# Altium PCB MAGIsDebugger-STLink.PcbDoc
Units mil, origin at the board's own origin, x right, y up, seen from the top; angles counter-clockwise.
Board outline 6000 x 4000 mil, 2 copper layers (Top Layer, Bottom Layer); 31 components, 25 nets, 167 pads, 21 vias.
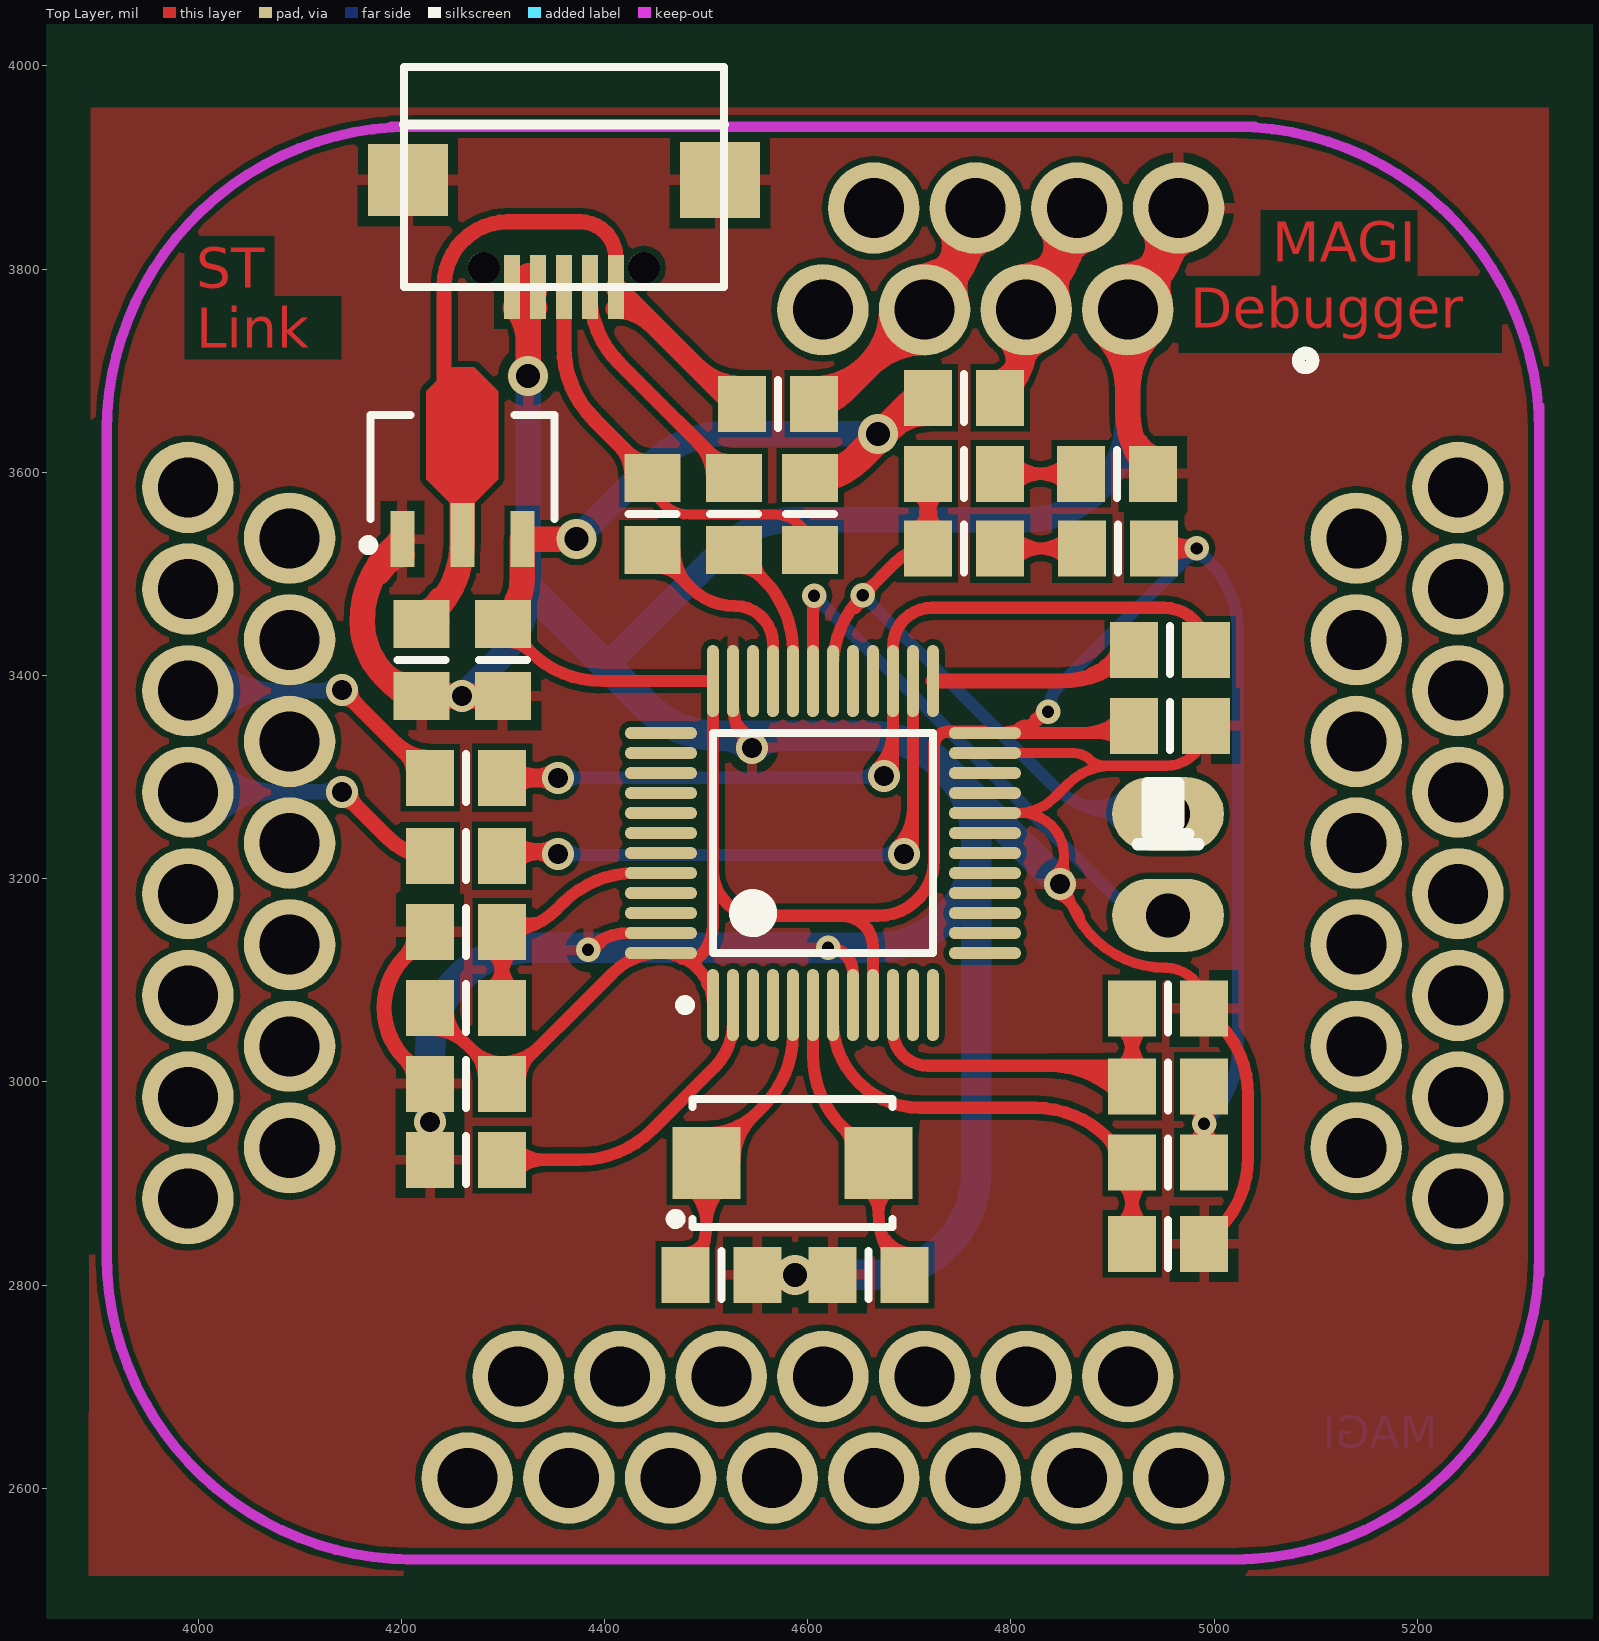
[diagram p0: Top Layer view]
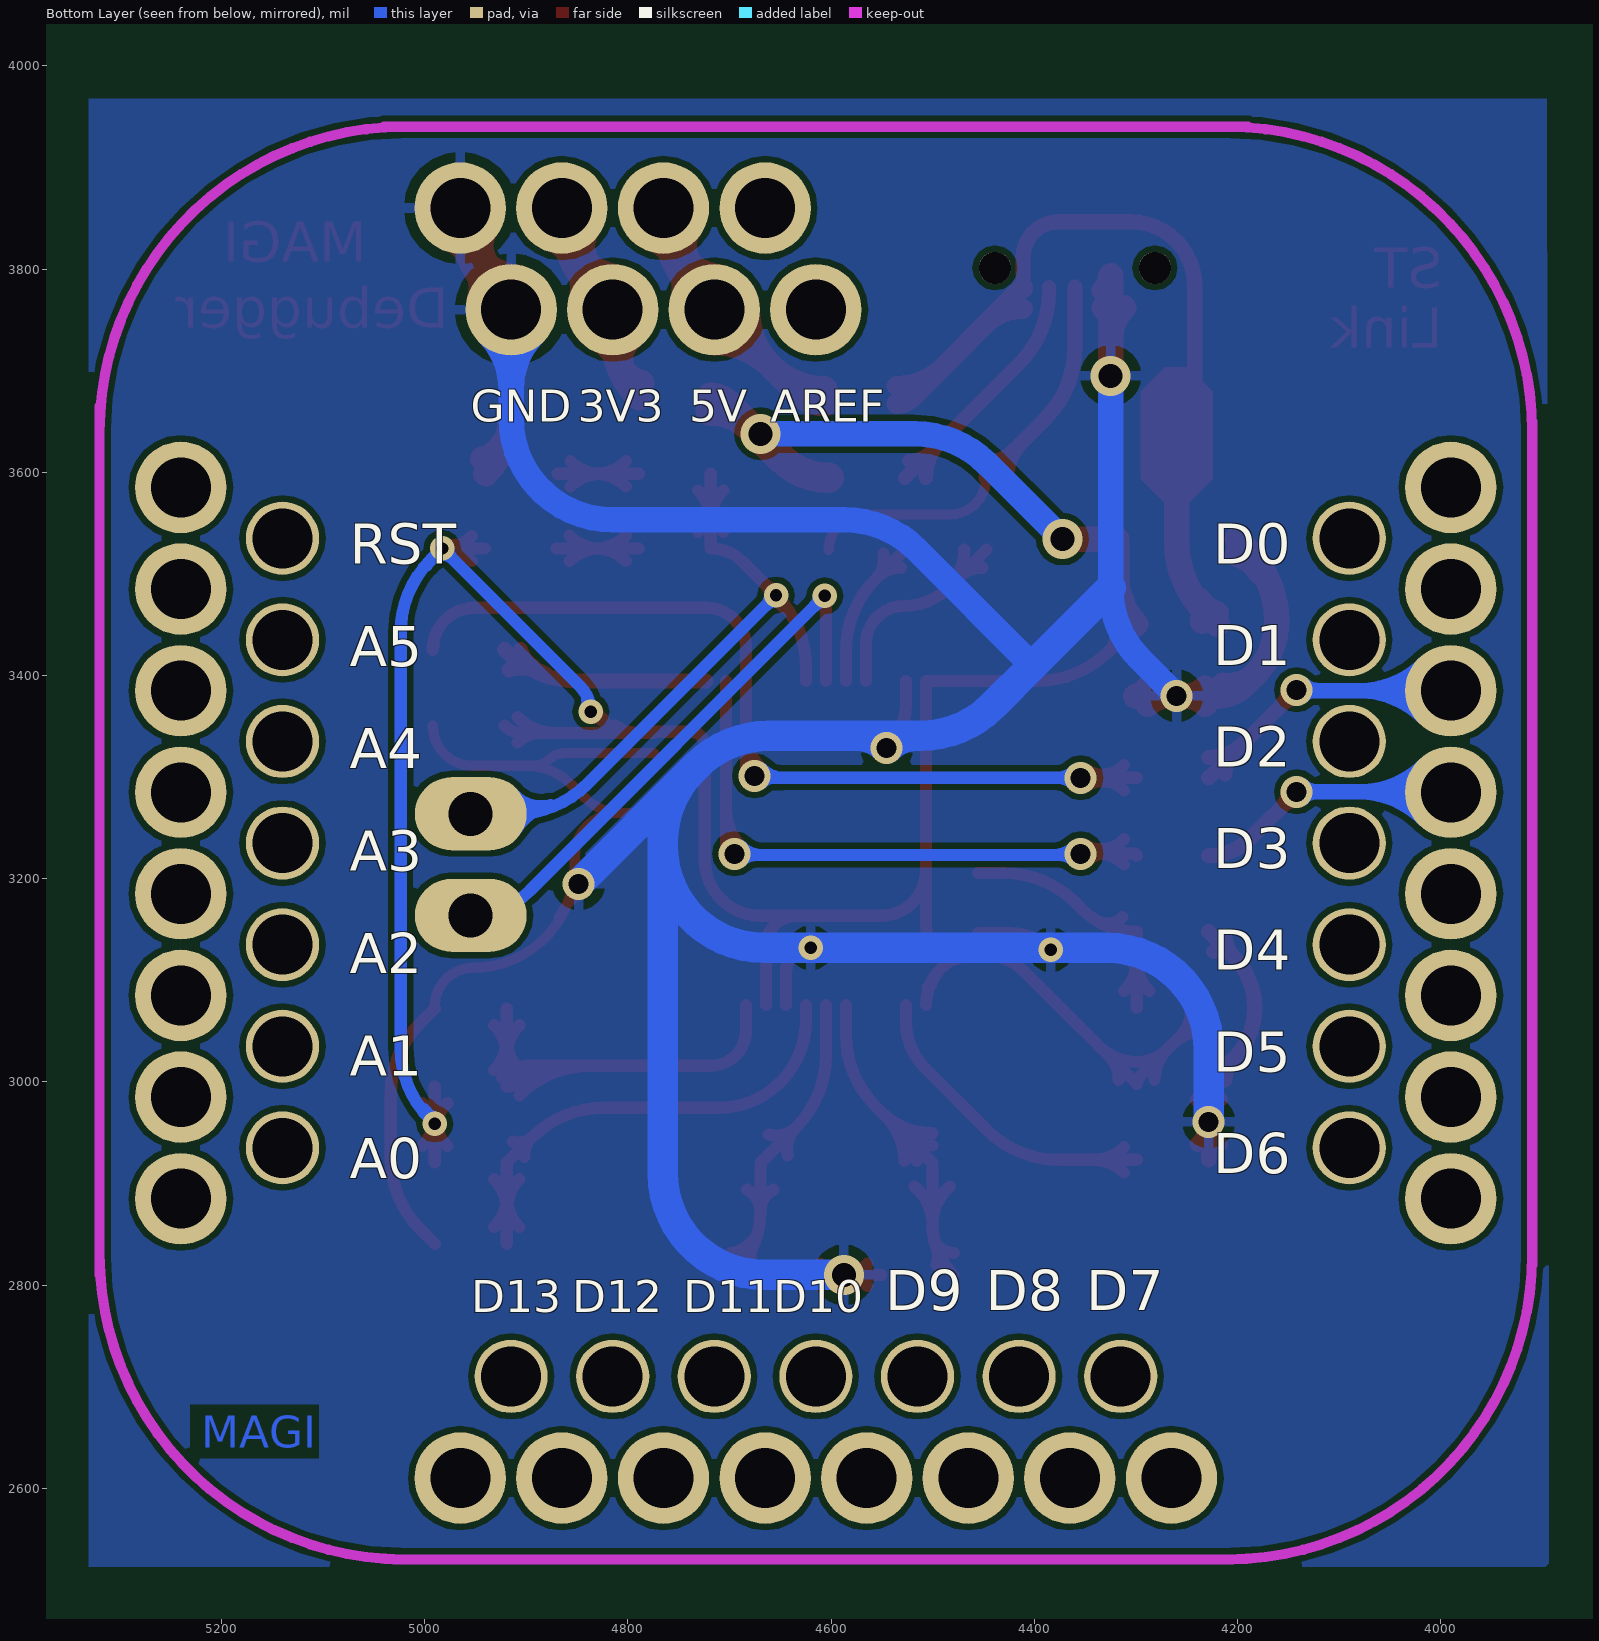
[diagram p1: Bottom Layer view, seen from below]

## Layer stack, top to bottom
Top Solder: solder mask 0.4, Solder Resist, Dk 3.5
Top Layer: signal copper 1.4
Dielectric 1: dielectric 12.6, FR-4, Dk 4.8
Bottom Layer: signal copper 1.4
Bottom Solder: solder mask 0.4, Solder Resist, Dk 3.5

## Board outline
1000,1000 7000,1000 7000,5000 1000,5000

## Design rules (kind name [scope] priority, off if disabled: settings)
Clearance [All] p1: gap=6
PolygonConnect [All] p1: connectstyle=Relief reliefconductorwidth=10 reliefentries=4 polygonreliefangle="90 Angle" airgapwidth=10
RoutingVias [All] p1: holewidth=28 width=50 viastyle="Through Hole" minholewidth=12 minwidth=24 maxholewidth=280 maxwidth=500
SolderMaskExpansion [All] p1: expansion=4
Width [All] p1: maxlimit=100 minlimit=6 preferedwidth=10
29 further rules are at their usual default settings.

## Components (designator, comment, footprint, x,y, rotation, side; value= is the part's Value field where it differs from the comment)
C1 "10uf" 6-0805_n 4220,3415 r270 top
C2 "10uf" 6-0805_n 4300,3415 r270 top
C3 "10uf" 6-0805_n 4263.78,2998.03 r180 top
C4 "10uf" 6-0805_N 4956.69,3350.39 r0 top
C5 "15PF" 6-0805_n 4515,2810 r180 top
C6 "15PF" 6-0805_n 4660,2810 r0 top
C7 "104" 6-0805_n 4954.72,2840.55 r180 top
J1 "MAGIsBoard-2x" MAGIsBoard-2x 4615,3235 r0 top
J2 "CON2" SIP2 4954.72,3263.78 r270 top
LED1 "LED_3" 6-0805_n 4905.51,3525 r180 top
LED2 "LED_3" 6-0805_n 4904.57,3598.42 r0 top
R1 "10K" 6-0805_n 4602.36,3559.06 r270 top
R2 "10K" 6-0805_n 4527.36,3559.06 r270 top
R3 "10K" 6-0805_n 4954.72,2995.35 r0 top
R4 "10K" 6-0805_n 4447.36,3559.06 r270 top
R5 "100" 6-0805_n 4956.69,3425.2 r180 top
R6 "10K" 6-0805_n 4954.72,3072.13 r180 top
R7 "10K" 6-0805_n 4263.78,2923.23 r0 top
R8 "0" 6-0805_n 4570.87,3667.32 r0 top
R9 "0" 6-0805_n 4753.94,3673.23 r0 top
R10 "10K" 6-0805_n 4954.72,2920.55 r0 top
R11 "10K" 6-0805_n 4263.78,3072.83 r180 top
R12 "0" 6-0805_n 4263.78,3299.21 r180 top
R13 "10K" 6-0805_n 4263.78,3147.64 r0 top
R15 "0" 6-0805_n 4263.78,3222.44 r180 top
R16 "RES1_1" 6-0805_n 4753.94,3525 r180 top
R17 "RES1_1" 6-0805_n 4753.94,3598.43 r180 top
U1 "USB" microUSB 4360,3805 r0 top
U2 "STM32F103CBT6" LQFP48_N 4615,3235 r90 top
U3 "HS7333" HS7333 4260,3605 r90 top
X1 "8M" 5032 4595,2920 r270 top

## Footprints (in the part's own frame and the unit in brackets; to place one, negate y for a bottom-side part, rotate by r counter-clockwise, add the part's x,y. Pads: shape width x height; smd on the part's side, far side on the other; paste and mask are expansions set on the pad)
6-0805_n [mm] "Chip Resistor, Body 2.0x1.2mm, IPC Medium Density"
  rect 1.2x1.4 smd: 1(-0.9,0) 2(0.9,0)
  silkscreen extent 0,-0.6 0,0.6, body extent -1.07,-0.7 1.07,0.7, height 0.7
6-0805_N [mm] "Chip Resistor, Body 2.0x1.2mm, IPC Medium Density"
  rect 1.2x1.4 smd: 1(-0.9,0) 2(0.9,0)
  silkscreen extent 0,-0.6 0,0.6, body extent -1.07,-0.7 1.07,0.7, height 0.7
5032 [mm]
  rect 1.8x1.7 smd: 1(0,-2.404) 2(0,1.896)
  silkscreen extent -1.6,-3.3 1.6,2.25
HS7333 [mm] "SOT89, 3-Leads, Body 4.50x2.50mm, Pitch 1.50mm, Lead Span 4.1mm, IPC Medium Density"
  rect 1.4x0.6 smd: 1(-1.8,1.5) 3(-1.8,-1.5)
  rect 1.6x0.6 smd: 2(-1.7,0)
  Top Layer region: -0.9,0.3 -0.3,0.9 1.9,0.9 2.5,0.3 2.5,-0.3 1.9,-0.9 -0.3,-0.9 -0.9,-0.3
  silkscreen extent -2.07,-2.3 1.3,2.47, body extent -1.3,-2.3 1.3,2.3, height 1.6
LQFP48_N [mm] "Thin QFP, 48-Leads, Body 7x7mm, Pitch 0.5mm, IPC Medium Density"
  oval 1.8x0.3 smd: 1(-4.05,2.75) 2(-4.05,2.25) 3(-4.05,1.75) 4(-4.05,1.25) 5(-4.05,0.75) 6(-4.05,0.25) 7(-4.05,-0.25) 8(-4.05,-0.75) 9(-4.05,-1.25) 10(-4.05,-1.75) 11(-4.05,-2.25) 12(-4.05,-2.75) 25(4.05,-2.75) 26(4.05,-2.25) 27(4.05,-1.75) 28(4.05,-1.25) 29(4.05,-0.75) 30(4.05,-0.25) 31(4.05,0.25) 32(4.05,0.75) 33(4.05,1.25) 34(4.05,1.75) 35(4.05,2.25) 36(4.05,2.75)
  oval 0.3x1.8 smd: 13(-2.75,-4.05) 14(-2.25,-4.05) 15(-1.75,-4.05) 16(-1.25,-4.05) 17(-0.75,-4.05) 18(-0.25,-4.05) 19(0.25,-4.05) 20(0.75,-4.05) 21(1.25,-4.05) 22(1.75,-4.05) 23(2.25,-4.05) 24(2.75,-4.05) 37(2.75,4.05) 38(2.25,4.05) 39(1.75,4.05) 40(1.25,4.05) 41(0.75,4.05) 42(0.25,4.05) 43(-0.25,4.05) 44(-0.75,4.05) 45(-1.25,4.05) 46(-1.75,4.05) 47(-2.25,4.05) 48(-2.75,4.05)
  silkscreen extent -4.17,-2.75 2.75,3.57, body extent -3.5,-3.5 3.5,3.5, height 1.6
MAGIsBoard-2x [mil]
  round 90 hole 59.06: 1(300,525) 1(350,625) 2(200,525) 2(250,625) 3(100,525) 3(150,625) 4(0,525) 4(50,625) 29(-625,350) 30(-625,250) 31(-625,150) 32(-625,50) 33(-625,-50) 34(-625,-150) 35(-625,-250) 36(-625,-350) 37(-350,-625) 38(-250,-625) 39(-150,-625) 40(-50,-625) 41(50,-625) 42(150,-625) 43(250,-625) 44(350,-625) 45(625,-350) 46(625,-250) 47(625,-150) 48(625,-50) 49(625,50) 50(625,150) 51(625,250) 52(625,350)
  round 90 / inner round 90 / far side round 72 hole 59.06: 8(-525,300) 9(-525,200) 10(-525,100) 11(-525,0) 12(-525,-100) 13(-525,-200) 14(-525,-300) 15(-300,-525) 16(-200,-525) 17(-100,-525) 18(0,-525) 19(100,-525) 20(200,-525) 21(300,-525) 22(525,-300) 23(525,-200) 24(525,-100) 25(525,0) 26(525,100) 27(525,200) 28(525,300)
  Keep-Out Layer lines w10: -705,-415 -705,415 ; -705,-405 ccw(c-405,-405) -405,-705 ; -705,405 cw(c-405,405) -405,705 ; -425,705 425,705 ; -410,-705 415,-705 ; 405,-705 ccw(c405,-405) 705,-405 ; 405,705 cw(c405,405) 705,405 ; 705,-425 705,430
  silkscreen extent 468,468 482,482
microUSB [mm]
  round 0.8 hole 0.8: 0(-2,-0.1) 0(2,-0.1)
  rect 0.4x1.6 smd: 1(1.3,-0.576) 2(0.65,-0.576) 3(0,-0.576) 4(-0.65,-0.576) 5(-1.3,-0.576)
  rect 2x1.8 smd: 6(-3.9,2.1)
  rect 2x1.9 smd: 7(3.9,2.1)
  silkscreen extent -4,-0.58 4,4.92, body extent -4.1,-0.68 4.1,5.02, height 3
SIP2 [mil]
  oval 72x110 hole 43.31: 1(0,0) 2(100,0)
  silkscreen extent -30,-30 30,30

## Part data
C1 C2 C3 C4: library part "CAPACITOR POL", "Capacitor"
C5 C6 C7: library part CAP
J2: "Connector"
R1 R2 R3 R4 R5 R6 R7 R8 R9 R10 R11 R12 R13 R15: library part RES
U2: "STM32 ARM-based 32-bit MCU with 128 Kbytes Flash, 48-pin LQFP, Industrial Temperature"
X1: library part CRYSTAL

## Via types
v1: diameter 31.5, hole 19.68, Top Layer to Bottom Layer, 10 vias
v2: diameter 24, hole 12, Top Layer to Bottom Layer, 7 vias
v3: diameter 39.37, hole 23.62, Top Layer to Bottom Layer, 4 vias

## Nets (pads, with @x,y where several pads share a name; then routed paths per layer and width w, separated by ;. In a path a pad name is that pad's centre, name@x,y a point inside that pad or via, vN(x,y) a via of type N, cw(c..) or ccw(c..) an arc to the next point about the centre after c; other vN are vias at no path point)
3.3V: C2.1 C3.1 C4.1 LED1.1 R1.1 R3.2 R9.1 R10.2 R11.2 U2.1 U2.9 U2.24 U2.36 U2.48 U3.3 | length 4088.3
  Top Layer w12: R11.2@4228.35,3051.27 cw(c4228.35,2999.23) 4265.15,3036.03 ; R11.2 4296.43,3004.75 cw(c4289.71,2998.03) C3.1 4408.37,3107.19 cw(c4455.55,3060) U2.48 cw(c4455.55,3075.55) 4485.47,3117.07 ; R11.2@4245.97,3068.9 ccw(c4279.01,3068.9) 4255.64,3045.54 ; C3.1@4281.59,3001.97 ccw(c4239.05,3001.97) 4269.13,3032.05 ccw(c4299.21,3062.14) 4299.21,3019.59 ccw(c4299.21,3071.64) 4336.02,3034.84 ; C2.1 4326.7,3423.74 ; C2.1@4304.24,3432.81 cw(c4304.77,3401.82) 4326.7,3423.74 ; C3.1@4316.83,3001.97 cw(c4349.87,3001.97) 4326.51,3025.33 ; C2.1@4320.92,3445.72 ccw(c4342.64,3439.68) 4326.7,3423.74 ; U2.48@4473.08,3125.24 ccw(c4478,3125.85) U2.48@4476.72,3121.06 ; U2.1@4501.06,3096.72 ccw(c4505.85,3098) U2.1@4505.24,3093.08 ; U2.1 ccw(c4455.55,3075.55) 4485.47,3117.07 ; U2.9 4664.21,3133.03 ccw(c4633.86,3133.03) 4633.86,3163.39 ; U2.24@4803.89,3343.32 cw(c4817.34,3335.55) 4813.32,3350.55 ; v2@4830.82,3365.73 cw(c4816.83,3369.48) 4824.07,3356.93 cw(c4831.31,3344.39) v2@4835.06,3358.38 ; v2(4836.61,3364.17) cw(c4786.14,3414.64) U2.24@4786.14,3343.27 ; 4871.02,3343.27 ccw(c4871.02,3396.7) C4.1@4908.8,3358.92 ; 4886.42,3343.27 cw(c4886.42,3311.61) C4.1@4908.8,3334 ; C4.1 cw(c4904.06,3367.6) 4904.06,3343.27 U2.24@4786.14,3343.27 ; LED1.1 v2(4982.83,3525) ccw(c4982.83,3527.02) v2@4984.25,3525.59 ; LED1.1@4953.54,3512.68 cw(c4982.82,3484.05) v2(4982.83,3525) cw(c4982.82,3565.95) LED1.1@4953.54,3537.32 ; v2@4977.63,3522 ccw(c4965.09,3514.76) 4968.84,3528.75 ccw(c4972.58,3542.74) v2@4979.83,3530.2 ; v2@4977.63,3528 cw(c4965.09,3535.24) 4968.84,3521.25 cw(c4972.58,3507.26) v2@4979.83,3519.8 ; R10.2@4977.7,2936.95 ccw(c4947.61,2967.03) 4990.16,2967.03 ccw(c5032.7,2967.03) R10.2@5002.62,2936.95 ; R3.2@4977.7,2978.96 cw(c4947.61,2948.87) 4990.16,2948.87 cw(c5032.7,2948.87) R3.2@5002.62,2978.96 ; v2@4978.58,3520.76 ccw(c4968.34,3510.51) 4968.34,3525 ccw(c4968.34,3539.49) v2@4978.58,3529.24 ; R3.2@4983.32,2974.38 ccw(c4997.92,2978.29) v2@4992.36,2964.24 ; R10.2@4983.49,2942.14 cw(c5000.14,2937.68) v2@4992.73,2953.24 ; v2@4985.91,2954.42 cw(c4975.67,2944.18) 4990.16,2944.18 cw(c5004.64,2944.18) v2@4994.4,2954.42 ; v2@4985.91,2962.9 ccw(c4975.67,2973.15) 4990.16,2973.15 ccw(c5004.64,2973.15) v2@4994.4,2962.9 ; v2@4987.58,2953.24 cw(c4980.18,2937.67) R10.2@4996.83,2942.14 ; v2@4987.95,2964.24 ccw(c4982.4,2978.29) R3.2@4996.99,2974.38 ; R10.2 R3.2 ; 4326.7,3423.74 ccw(c4397.41,3494.45) 4397.41,3394.45 U2.36 4506.73,3207.83 ; 4485.47,3117.07 ccw(c4485.47,3121.13) 4488.33,3118.25 4494.09,3124.02 ccw(c4463.58,3154.53) 4506.73,3154.53 4506.73,3207.83 ; 4506.73,3207.83 ccw(c4551.18,3207.83) 4551.18,3163.39 4633.86,3163.39 ; 4633.86,3163.39 4669.29,3163.39 ccw(c4669.29,3218.5) 4724.41,3218.5 4724.41,3330.71 cw(c4738.19,3330.71) 4738.19,3344.49 4773.23,3344.49 cw(c4773.23,3343.27) U2.24 U2.24@4786.14,3343.27
  Top Layer w25: C2.1 ccw(c4253.99,3496.44) 4319.06,3496.44 U3.3 v3(4372.4,3534.13) cw(c4372.4,3531.85) v3@4374.02,3533.46 ; C2.1@4314.24,3454.62 cw(c4338.87,3464.61) 4315.85,3477.89
  Top Layer w30: R1.1 ccw(c4602.36,3661.02) 4649.41,3613.98 4701.7,3666.27 cw(c4718.5,3649.47) R9.1 ; v3@4680.26,3644.83 cw(c4718.5,3606.59) R9.1@4718.5,3660.67
  Bottom Layer w12: v2@4833.61,3369.37 ccw(c4826.37,3381.91) 4840.36,3378.16 ccw(c4854.35,3374.42) v2@4841.81,3367.17 ; v2(4836.61,3364.17) cw(c4871.9,3364.17) 4846.95,3389.12 v2(4982.83,3525) 4994.33,3513.49 cw(c4923.62,3442.78) 5023.62,3442.78 5023.62,3033.55 cw(c4923.62,3033.55) 4994.33,2962.84 v2(4990.16,2958.66) ; v2@4976.83,3525 cw(c4962.34,3525) 4972.58,3514.76 cw(c4982.83,3504.51) v2@4982.83,3519 ; v2@4981.7,3519.11 cw(c4976.98,3494.25) 4997.9,3508.48 ; v2@4988.76,2964.5 ccw(c4984.3,2983.15) 5000.64,2973.11
  Bottom Layer w25: v3(4372.4,3534.13) 4446.77,3608.51 cw(c4517.48,3537.8) 4517.48,3637.8 v3(4669.29,3637.8)
5V: C1.1 R8.1 U1.1 U3.2 | length 876.7
  Top Layer w15: 4246.06,3631.89 cw(c4246.06,3635.83) 4242.13,3635.83 4242.13,3783.46 cw(c4305.12,3783.46) 4305.12,3846.46 4375.98,3846.46 cw(c4375.98,3811.26) 4411.18,3811.26 U1.1
  Top Layer w20: U1.1@4411.18,3760.85 cw(c4411.18,3708.95) 4447.88,3745.65 ; U1.1@4411.18,3780.85 cw(c4411.18,3777.23) U1.1@4413.74,3779.79 ; U1.1 4519.67,3673.85 ccw(c4535.43,3689.61) R8.1 ; 4489.7,3703.83 ccw(c4535.43,3749.56) R8.1@4535.43,3684.88
  Top Layer w25: C1.1 4230.71,3461.14 ccw(c4160,3531.86) 4260,3531.86 U3.2 4260,3588.54 ccw(c4246.02,3588.54) 4255.91,3598.43 ; C1.1@4221.06,3461.18 ccw(c4213.66,3488.8) 4238.42,3474.5 ; C1.1@4234.68,3453.31 cw(c4258.93,3459.81) C1.1@4237.19,3472.36
BOOT0: R11.1 R13.2 U2.44 | length 422.1
  Top Layer w12: R11.1@4286.75,3089.23 ccw(c4256.67,3119.31) 4299.21,3119.31 ccw(c4341.76,3119.31) R11.1@4311.67,3089.23 ; R13.2@4286.75,3131.24 cw(c4256.67,3101.16) 4299.21,3101.16 cw(c4341.76,3101.16) R13.2@4311.67,3131.24 ; R11.1 R13.2 ccw(c4299.21,3223.68) 4352.98,3169.91 4359.25,3176.18 cw(c4429.96,3105.47) 4429.96,3205.47 U2.44 ; R13.2@4313.29,3162.18 ccw(c4326.57,3172.18) 4330.87,3156.12 ccw(c4337.54,3131.23) R13.2@4314.78,3143.31
GND: C1.2 C2.2 C3.2 C4.2 C5.1 C6.1 C7.1 J1.1 LED2.2 R6.1 R7.1 R13.1 U1.4 U1.5 U1.6 U1.7 U2.8 U2.20 U2.23 U2.35 U2.47 U3.1 | length 6633.7
  Top Layer w10: U2.20 U2.20@4806.31,3264.53 ; U2.23 4861.89,3323.58 cw(c4861.89,3300.87) 4877.95,3316.93 ccw(c4892.21,3331.19) 4892.21,3311.02 4899.61,3311.02 ; v1@4842.43,3203.8 ccw(c4829.91,3222.44) 4852.36,3222.44 ; v1@4844.47,3184.89 cw(c4828.71,3145.05) 4868.02,3162.08 ; v1@4846.67,3205.48 ccw(c4845.55,3212.2) 4852.36,3212.2 ; R6.1 4990.16,3074.41 ccw(c4952.36,3074.41) 4952.36,3112.2 cw(c4952.36,3212.2) 4852.36,3212.2 ; C4.2 cw(c4952.76,3350.39) 4952.76,3311.02 4899.61,3311.02 ; U2.20@4806.31,3264.53 ccw(c4806.31,3315.74) 4842.52,3279.53 4855.92,3292.93 cw(c4899.61,3249.24) 4899.61,3311.02 ; U2.20@4806.31,3264.53 4810.28,3264.53 cw(c4810.28,3222.44) 4852.36,3222.44 ; 4852.36,3212.2 4852.36,3222.44 ; 4852.36,3211.33 ccw(c4864.87,3211.33) 4856.03,3202.48 cw(c4864.87,3211.33) 4852.36,3211.33
  Top Layer w12: v2(4383.86,3129.92) cw(c4423.68,3090.09) 4423.68,3146.42 U2.47 ; v2@4385.41,3135.72 ccw(c4389.16,3149.71) 4396.4,3137.16 ccw(c4403.65,3124.62) v2@4389.65,3128.37 ; U2.35 4526.42,3371.48 ccw(c4584.08,3371.48) v1@4543.31,3330.71 ; 4532.01,3350.27 ccw(c4554.53,3363.26) v1@4547.8,3338.16 ; 4533.75,3347.25 cw(c4515.5,3336.72) v1@4535.86,3331.26 ; C5.1 v3(4587.5,2810) ; C5.1@4564.1,2798.88 cw(c4587.5,2779.83) v3(4587.5,2810) ; C5.1@4564.1,2821.12 ccw(c4587.5,2840.17) v3(4587.5,2810) ; v3@4577.82,2800.32 ccw(c4554.46,2776.96) 4554.46,2810 ccw(c4554.46,2843.04) v3@4577.82,2819.68 ; v3@4597.18,2800.32 cw(c4620.54,2776.96) 4620.54,2810 cw(c4620.54,2843.04) v3@4597.18,2819.68 ; C6.1@4610.9,2798.88 ccw(c4587.5,2779.83) v3(4587.5,2810) ; C6.1@4610.9,2821.12 cw(c4587.5,2840.17) v3(4587.5,2810) ; v2(4620.08,3131.89) cw(c4620.08,3107.44) 4644.53,3107.44 U2.8 ; v2@4623.58,3127.02 cw(c4629.62,3118.62) 4632.3,3128.61 cw(c4634.98,3138.61) v2@4625.55,3134.36 ; C6.1 v3(4587.5,2810) ; C7.1 5004.18,2854.57 ccw(c4933.46,2925.28) 5033.46,2925.28 5033.46,2987.4 ccw(c4933.46,2987.4) 5004.18,3058.11 R6.1
  Top Layer w15: C3.2@4212.22,3002.14 ccw(c4183.97,3002.45) 4203.95,3022.43 ; R13.1@4212.22,3143.53 cw(c4183.97,3143.22) 4203.95,3123.24 ; R7.1@4216.95,2938.56 ccw(c4189.42,2966.09) 4228.35,2966.09 ccw(c4267.27,2966.09) R7.1@4239.75,2938.56 ; C3.2@4216.95,2982.7 cw(c4189.42,2955.17) 4228.35,2955.17 cw(c4267.27,2955.17) C3.2@4239.75,2982.7 ; v1@4222.51,2954.8 cw(c4208.43,2940.72) 4228.35,2940.72 cw(c4248.26,2940.72) v1@4234.18,2954.8 ; v1@4222.51,2966.46 ccw(c4208.43,2980.54) 4228.35,2980.54 ccw(c4248.26,2980.54) v1@4234.18,2966.46 ; C3.2@4223.74,3017.42 cw(c4218.05,3036.52) 4203.95,3022.43 ; R13.1@4223.74,3128.25 ccw(c4218.05,3109.15) 4203.95,3123.24 ; R7.1 C3.2 4203.95,3022.43 ; R13.1 4203.95,3123.24 ; 4203.95,3022.43 cw(c4254.36,3072.83) 4183.07,3072.83 cw(c4254.36,3072.83) 4203.95,3123.24
  Top Layer w25: 4177.68,3501.34 cw(c4210.6,3482.33) U3.1@4200.77,3519.05 ; U3.1 4190.71,3523.9 ccw(c4261.42,3453.19) 4161.42,3453.19 ccw(c4235.97,3453.19) 4178.44,3405.77 ccw(c4235.97,3453.19) 4183.25,3400.47 ; C1.2@4214.24,3390.54 cw(c4208.4,3425.62) 4183.25,3400.47 ; C1.2@4231.8,3371.7 cw(c4250.79,3352.72) 4250.79,3379.57 cw(c4250.79,3406.42) C1.2@4231.8,3387.43 ; C2.2@4288.2,3371.7 ccw(c4269.21,3352.72) 4269.21,3379.57 ccw(c4269.21,3406.42) C2.2@4288.2,3387.43 ; C2.2 C1.2 cw(c4220,3417.81) 4192.96,3390.77 4183.25,3400.47 ; U1.5@4312.09,3761.99 cw(c4281.4,3731.3) 4324.8,3731.3 ; v3(4324.8,3694.88) 4324.8,3793.31 ccw(c4343.99,3793.31) U1.4@4331.37,3778.86 ; 4324.8,3746.7 cw(c4346.44,3746.7) U1.4@4331.14,3761.99 ; J1.1@4892.02,3737.02 cw(c4836.54,3681.54) 4915,3681.54 cw(c4993.46,3681.54) J1.1@4937.98,3737.02 ; J1.1@4909.8,3792.08 ccw(c4897.56,3867.56) J1.1@4963.78,3829.33 ; 4922.49,3628.75 ccw(c4951.57,3645.53) LED2.2@4942.88,3613.11 ; 4935.79,3801.34 ccw(c4914.33,3822.81) J1.1@4938.8,3840.77 ; LED2.2 cw(c5000.36,3658.78) 4915,3658.78 4915,3760 4935.71,3780.71 ccw(c4865,3851.42) 4965,3851.42 J1.1@4965,3860 ; J1.1@4943.43,3835.69 cw(c4923.28,3812.99) 4952.6,3805.14 cw(c4986.21,3796.13) J1.1@4975.24,3829.16 ; J1.1@4946.39,3768.41 cw(c4997.18,3782.02) 4951.65,3808.31
  Bottom Layer w25: v1(4259.84,3379.92) 4295.51,3415.59 ccw(c4224.8,3486.3) 4324.8,3486.3 v3(4324.8,3694.88) ; 4401.62,3409.49 4515.99,3523.86 cw(c4586.7,3453.15) 4586.7,3553.15 4815,3553.15 ccw(c4815,3653.15) 4915,3653.15 J1.1@4915,3760 ; J1.1@4892.02,3737.02 cw(c4836.54,3681.54) 4915,3681.54 cw(c4993.46,3681.54) J1.1@4937.98,3737.02
  Bottom Layer w30: v1(4228.35,2960.63) 4228.35,3031.89 cw(c4328.35,3031.89) 4328.35,3131.89 v2(4620.08,3131.89) 4665.75,3131.89 ccw(c4665.75,3231.89) 4765.75,3231.89 ; 4324.8,3486.3 4401.62,3409.49 4441.27,3369.84 ccw(c4511.98,3440.55) 4511.98,3340.55 4661.33,3340.55 cw(c4661.33,3240.55) 4732.05,3311.26 4736.46,3306.85 ; 4514.96,3340.55 cw(c4514.96,3298.42) v1@4544.75,3328.21 ; v1@4545.8,3328.21 cw(c4575.6,3298.42) 4575.6,3340.55 ; v3(4587.5,2810) 4665.75,2810 ccw(c4665.75,2910) 4765.75,2910 4765.75,3231.89 ; v1(4848.43,3194.88) 4736.46,3306.85 ; 4736.46,3306.85 cw(c4665.75,3236.14) 4765.75,3236.14 4765.75,3231.89
  other v1: 4545.28,3328.74
LED: J2.1 R16.2 R17.2 U2.30 | length 1026
  Top Layer w12: U2.30 4624.84,3408.22 cw(c4724.84,3408.22) v2(4654.13,3478.93) 4687.25,3512.05 cw(c4718.5,3480.8) R16.2 R17.2 ; v2@4648.34,3477.38 cw(c4634.34,3473.63) 4646.89,3466.39 cw(c4659.43,3459.15) v2@4655.68,3473.14 ; v2@4654.13,3484.93 ccw(c4654.13,3499.42) 4664.37,3489.18 ccw(c4674.62,3478.93) v2@4660.13,3478.93 ; R16.2@4706.04,3541.4 ccw(c4675.96,3571.48) 4718.5,3571.48 ccw(c4761.05,3571.48) R16.2@4730.96,3541.4 ; R17.2@4706.04,3582.03 cw(c4675.96,3551.95) 4718.5,3551.95 cw(c4761.05,3551.95) R17.2@4730.96,3582.03 ; R17.2@4708.29,3580.13 cw(c4697.52,3564.98) 4715.47,3560.17 ; R17.2@4709.69,3579.23 cw(c4698.59,3559.99) 4720.04,3565.74 ; 4716.97,3565.74 cw(c4738.42,3559.99) R17.2@4727.32,3579.23 ; 4721.53,3560.17 cw(c4739.48,3564.98) R17.2@4728.72,3580.13
  Bottom Layer w12: v2@4654.13,3472.93 cw(c4654.13,3458.45) 4664.37,3468.69 cw(c4674.62,3478.93) v2@4660.13,3478.93 ; v2(4654.13,3478.93) 4840,3293.07 ccw(c4910.71,3363.78) 4910.71,3263.78 J2.1 ; 4876.15,3272.13 ccw(c4885.06,3308.96) J2.1@4913.33,3283.75 ; 4877.74,3271.75 cw(c4865.44,3220.86) J2.1@4910.12,3248.15 ; 4895.61,3267.43 ccw(c4902,3293.85) J2.1@4922.29,3275.76
NetJ1_2: J1.2 R9.2 | length 530.7
  Top Layer w25: R9.2@4786.49,3687.91 ccw(c4777.8,3720.34) 4806.88,3703.55 ; R9.2 ccw(c4727.49,3735.1) 4815,3735.1 4815,3760 4835.71,3780.71 ccw(c4765,3851.42) 4865,3851.42 J1.2@4865,3860 ; J1.2@4795.26,3734.18 cw(c4776.77,3710.01) 4806.17,3702.13 cw(c4850.1,3690.36) J1.2@4829.63,3730.98 ; J1.2@4809.8,3792.08 ccw(c4797.56,3867.56) J1.2@4863.78,3829.33 ; 4835.79,3801.34 ccw(c4814.33,3822.81) J1.2@4838.8,3840.77 ; J1.2@4843.43,3835.69 cw(c4823.28,3812.99) 4852.6,3805.14 cw(c4886.21,3796.13) J1.2@4875.24,3829.16 ; J1.2@4846.39,3768.41 cw(c4897.18,3782.02) 4851.65,3808.31
NetJ1_3: J1.3 R8.2 | length 664.1
  Top Layer w25: R8.2 ccw(c4606.3,3706) 4633.65,3678.65 4735.71,3780.71 ccw(c4665,3851.42) 4765,3851.42 J1.3@4765,3860 ; R8.2@4606.3,3682.38 ccw(c4606.3,3757.42) 4659.36,3704.36 ; J1.3@4682.5,3760 cw(c4604.04,3760) 4659.52,3704.52 cw(c4715,3649.04) J1.3@4715,3727.5 ; J1.3@4709.8,3792.08 ccw(c4697.56,3867.56) J1.3@4763.78,3829.33 ; 4735.79,3801.34 ccw(c4714.33,3822.81) J1.3@4738.8,3840.77 ; J1.3@4743.43,3835.69 cw(c4723.28,3812.99) 4752.6,3805.14 cw(c4786.21,3796.13) J1.3@4775.24,3829.16 ; J1.3@4746.39,3768.41 cw(c4797.18,3782.02) 4751.65,3808.31
NetJ1_31: J1.31 R12.2 | length 625.9
  Top Layer w15: v1@4141.73,3377.58 cw(c4141.73,3357.67) 4155.81,3371.75 cw(c4169.89,3385.83) v1@4149.98,3385.83 ; v1(4141.73,3385.83) R12.2 ; 4194.1,3333.45 ccw(c4228.35,3367.7) R12.2@4228.35,3319.27 ; 4203.61,3323.95 cw(c4182.81,3303.15) R12.2@4212.22,3303.15
  Bottom Layer w15: J1.31 4140.91,3385 ccw(c4140.91,3385.83) v1(4141.73,3385.83) ; J1.31@4005.91,3369.09 cw(c4044.32,3330.68) 4044.32,3385 cw(c4044.32,3439.32) J1.31@4005.91,3400.91 ; J1.31@4016.52,3358.48 cw(c4080.53,3294.47) 4080.53,3385 cw(c4080.53,3475.53) J1.31@4016.52,3411.52 ; 4119.83,3385 ccw(c4119.83,3407.73) v1@4135.9,3391.66 ; 4123.81,3385 cw(c4123.81,3367.91) v1@4135.9,3379.99
NetJ1_32: J1.32 R15.2 | length 552.5
  Top Layer w15: v1@4141.73,3277.19 cw(c4141.73,3257.27) 4155.81,3271.35 cw(c4169.89,3285.43) v1@4149.98,3285.43 ; v1(4141.73,3285.43) 4188.02,3239.14 ccw(c4228.35,3279.47) R15.2
  Bottom Layer w15: J1.32 3990,3285.43 v1(4141.73,3285.43) ; J1.32@4005.91,3269.09 cw(c4045.37,3229.63) 4045.37,3285.43 ; J1.32@4005.91,3300.91 ccw(c4043.27,3338.27) 4043.27,3285.43 ; J1.32@4016.52,3258.48 cw(c4081.58,3193.42) 4081.58,3285.43 ; J1.32@4016.52,3311.52 ccw(c4079.49,3374.49) 4079.49,3285.43 ; v1@4135.9,3279.6 ccw(c4121.82,3265.52) 4121.82,3285.43 ccw(c4121.82,3305.35) v1@4135.9,3291.27
NetLED1_2: LED1.2 R16.1 | length 214.4
  Top Layer w12: R16.1 LED1.2 ; R16.1@4801.83,3512.54 cw(c4831.91,3482.46) 4831.91,3525 cw(c4831.91,3567.54) R16.1@4801.83,3537.46 ; LED1.2@4857.62,3512.54 ccw(c4827.53,3482.46) 4827.53,3525 ccw(c4827.53,3567.54) LED1.2@4857.62,3537.46
NetLED2_1: LED2.1 R17.1 | length 213.4
  Top Layer w12: R17.1 LED2.1 ; R17.1@4801.83,3585.97 cw(c4831.91,3555.88) 4831.91,3598.43 cw(c4831.91,3640.97) R17.1@4801.83,3610.89 ; LED2.1@4856.67,3585.97 ccw(c4826.59,3555.88) 4826.59,3598.43 ccw(c4826.59,3640.97) LED2.1@4856.67,3610.89
NetR2_2: R2.2 U2.32 | length 202.4
  Top Layer w12: R2.2 4556.18,3494.8 ; R2.2@4531.3,3506 cw(c4531.3,3472.96) 4554.66,3496.32 ; R2.2@4548.57,3520.11 ccw(c4575.92,3514.54) 4556.18,3494.8 ; U2.32 4585.47,3424.09 ccw(c4485.47,3424.09) 4556.18,3494.8
NetR4_2: R4.2 U2.33 | length 263.3
  Top Layer w12: R4.2 4484.5,3486.49 ccw(c4528.49,3530.48) 4498.15,3476.17 ccw(c4528.49,3530.48) 4528.49,3468.26 cw(c4528.49,3430.97) 4565.79,3430.97 U2.33 ; R4.2@4451.3,3506 cw(c4451.3,3472.96) 4474.66,3496.32 ; R4.2@4468.92,3523.62 ccw(c4520.97,3523.62) 4484.17,3486.82
NetR5_2: R5.2 U2.25 | length 267.6
  Top Layer w15: U2.25 4849.09,3394.45 ccw(c4849.09,3494.45) 4919.8,3423.74 R5.2 ; 4880.1,3400.82 cw(c4904.47,3358.61) R5.2@4917.09,3405.69 ; 4892.13,3407.76 ccw(c4877.58,3432.96) R5.2@4905.69,3425.43
NetR7_2: R7.2 U2.2 | length 375.4
  Top Layer w12: R7.2 4375.9,2923.23 ccw(c4375.9,3023.23) 4446.61,2952.52 4507.87,3013.78 ccw(c4463.1,3058.55) 4526.42,3058.55 U2.2 ; R7.2@4311.67,2910.77 cw(c4341.76,2880.68) 4341.76,2923.23 cw(c4341.76,2965.77) R7.2@4311.67,2935.69
NRST: C7.2 R10.1 U2.7 | length 631.5
  Top Layer w12: U2.7 4624.84,3060.2 ccw(c4710.63,3060.2) 4710.63,2974.41 4824.01,2974.41 cw(c4824.01,2874.41) 4894.72,2945.12 ; R10.1@4901.73,2925.97 ccw(c4877.6,2928) 4894.72,2945.12 ; C7.2@4906.83,2856.95 ccw(c4876.75,2887.03) 4919.29,2887.03 ccw(c4961.84,2887.03) C7.2@4931.75,2856.95 ; R10.1@4906.83,2904.15 cw(c4876.75,2874.07) 4919.29,2874.07 cw(c4961.84,2874.07) R10.1@4931.75,2904.15 ; R10.1@4913.23,2941.04 cw(c4907.18,2957.57) 4894.72,2945.12 ; C7.2 R10.1 4894.72,2945.12
OSC_IN: C5.2 U2.5 X1.1 | length 595.8
  Top Layer w12: C5.2@4479.33,2831.56 ccw(c4479.03,2854.04) 4498.5,2842.8 ccw(c4522.88,2828.73) C5.2@4496.24,2819.63 ; C5.2 ccw(c4429.38,2860.19) 4500.35,2860.19 ; X1.1@4483,2896.75 cw(c4453.18,2860.19) 4500.35,2860.19 ; X1.1@4500.35,2937.43 ccw(c4500.35,2979.52) X1.1@4530.11,2949.76 ; X1.1@4500.35,2949.43 ccw(c4500.35,3020.49) 4550.6,2970.25 ; X1.1@4515.82,2921.97 cw(c4548.4,2921.97) X1.1@4525.36,2945.01 ; X1.1@4517.71,2896.75 ccw(c4547.53,2860.19) 4500.35,2860.19 ; X1.1@4527.82,2921.97 cw(c4589.37,2921.97) 4545.85,2965.49 ; U2.5 4585.47,3046.54 cw(c4485.47,3046.54) 4556.18,2975.83 X1.1 4500.35,2860.19
OSC_OUT: C6.2 U2.6 X1.2 | length 469.5
  Top Layer w12: U2.6 4605.16,3025.91 ccw(c4705.16,3025.91) 4634.45,2955.2 ; X1.2@4642.75,2927.51 ccw(c4612.91,2933.65) 4634.45,2955.2 ; X1.2@4656.72,2893.8 cw(c4645.24,2872.26) 4669.65,2872.26 ; X1.2@4661.79,2948.29 cw(c4653.91,2974.66) 4634.45,2955.2 ; 4672.08,2850.45 ccw(c4706.74,2870.47) C6.2@4698.89,2831.22 ; 4674.83,2845.68 cw(c4643.81,2827.77) C6.2@4678.41,2818.5 ; X1.2@4682.57,2893.8 ccw(c4694.06,2872.26) 4669.65,2872.26 ; C6.2 cw(c4757.69,2872.26) 4669.65,2872.26 ; 4634.45,2955.2 X1.2 4669.65,2872.26
PA0-VREF: R3.1 R6.2 U2.10 | length 666.8
  Top Layer w12: U2.10 4683.9,3050.35 ccw(c4718.5,3050.35) 4718.5,3015.75 4898.9,3015.75 cw(c4898.9,2995.35) R3.1 R6.2 ; 4837.02,3015.75 cw(c4837.02,2917.02) R3.1@4906.83,2986.83 ; 4865.99,3015.75 cw(c4865.99,2945.99) R3.1@4915.32,2995.32 ; 4894.96,3015.75 cw(c4894.96,2974.96) R3.1@4923.8,3003.8 ; R3.1@4906.83,3011.75 ccw(c4876.75,3041.83) 4919.29,3041.83 ccw(c4961.84,3041.83) R3.1@4931.75,3011.75 ; R6.2@4906.83,3055.73 cw(c4876.75,3025.65) 4919.29,3025.65 cw(c4961.84,3025.65) R6.2@4931.75,3055.73
PA10: J2.2 U2.31 | length 596.6
  Top Layer w12: U2.31 4605.16,3475.59 cw(c4609.05,3475.59) v2(4606.3,3478.35) ; 4605.16,3461.11 cw(c4623.54,3461.11) v2@4610.54,3474.1
  Bottom Layer w12: v2@4606.3,3472.35 cw(c4606.3,3457.86) 4616.54,3468.1 cw(c4626.78,3478.35) v2@4612.3,3478.35 ; v2(4606.3,3478.35) 4896.92,3187.72 ccw(c4954.72,3245.52) J2.2
TCK: R15.1 U2.26 | length 872.5
  Top Layer w12: R15.1 cw(c4301.18,3222.44) 4301.18,3224.41 v1(4354.33,3224.41) ; R15.1@4311.67,3213.92 cw(c4337.01,3188.58) 4337.01,3224.41 ; R15.1@4311.67,3238.84 ccw(c4346.51,3273.67) v1@4346.51,3224.41 ; 4326.35,3229.81 ccw(c4334.23,3259.22) v1@4349.46,3232.85 ; 4335.8,3227.28 cw(c4331.5,3211.23) v1@4345.89,3219.54 ; v1@4347.44,3217.52 ccw(c4330.8,3200.88) 4330.8,3224.41 ccw(c4330.8,3247.94) v1@4347.44,3231.3 ; v1@4687.99,3231.3 ccw(c4650.34,3268.95) 4703.58,3268.95 ; v1(4694.88,3224.41) 4702.44,3224.41 v1@4703.58,3223.27 ; v1@4696.47,3222.82 ccw(c4679.31,3239.98) 4703.58,3239.98 ; v1@4702.76,3222.44 ccw(c4702.76,3223.27) v1@4703.58,3223.27 ; U2.26 v1@4703.58,3223.27
  Bottom Layer w12: v1(4354.33,3224.41) ccw(c4355.47,3224.41) 4355.47,3223.27 4703.58,3223.27 4702.44,3224.41 v1(4694.88,3224.41) ; v1@4361.22,3217.52 cw(c4375.11,3203.63) 4375.11,3223.27 ; v1@4361.22,3231.3 ccw(c4380.62,3250.7) 4380.62,3223.27 ; 4668.59,3223.27 ccw(c4668.59,3250.7) v1@4687.99,3231.3 ; 4674.11,3223.27 cw(c4674.11,3203.63) v1@4687.99,3217.52
TMS: R5.1 R12.1 U2.27 | length 1163.8
  Top Layer w12: R12.1 v1(4354.33,3299.21) ; R12.1@4311.67,3286.75 cw(c4341.76,3256.67) 4341.76,3299.21 cw(c4341.75,3341.75) R12.1@4311.67,3311.67 ; 4325.93,3294.97 cw(c4333.19,3267.87) v1@4348.88,3291.13 ; 4325.93,3303.45 ccw(c4333.19,3330.55) v1@4348.88,3307.29 ; 4338.35,3298.3 ccw(c4335.13,3310.3) v1@4345.89,3304.09 ; 4338.35,3300.13 cw(c4335.13,3288.13) v1@4345.89,3294.34 ; v1@4347.44,3292.32 ccw(c4330.8,3275.68) 4330.8,3299.21 ccw(c4330.8,3322.75) v1@4347.44,3306.11 ; v1@4668.3,3308.07 ccw(c4630.66,3345.72) 4683.9,3345.72 ; v1@4676.79,3299.59 ccw(c4659.63,3316.75) 4683.9,3316.75 ; v1@4683.9,3301.18 U2.27 4683.9,3427.99 cw(c4722.44,3427.99) 4722.44,3466.54 4950.79,3466.54 cw(c4950.79,3425.2) R5.1
  Bottom Layer w12: v1(4354.33,3299.21) 4673.23,3299.21 ccw(c4673.23,3301.18) v1(4675.2,3301.18) ; v1@4361.22,3292.32 cw(c4377.86,3275.68) 4377.86,3299.21 cw(c4377.86,3322.75) v1@4361.22,3306.11 ; 4646.91,3299.21 ccw(c4646.91,3329.47) v1@4668.3,3308.07 ; 4656.42,3299.21 cw(c4656.42,3282.4) v1@4668.3,3294.29
TRST: J1.28
USBDM: R2.1 U1.2 | length 305.3
  Top Layer w14: U1.2 4385.59,3777.68 ccw(c4485.59,3777.68) 4414.88,3706.97 R2.1 ; 4492.27,3629.58 cw(c4457.17,3594.49) R2.1@4506.8,3594.49 ; 4501.77,3620.08 ccw(c4523.43,3641.73) R2.1@4523.43,3611.11
USBDP: R1.2 R4.1 U1.3 | length 476.3
  Top Layer w10: R4.1 ccw(c4483.61,3594.49) 4483.61,3558.24 4567.74,3558.24 cw(c4567.74,3523.62) R1.2
  Top Layer w15: U1.3 4360,3723.27 ccw(c4460,3723.27) 4389.29,3652.56 R4.1 ; 4413.12,3628.73 cw(c4378.88,3594.49) R4.1@4427.3,3594.49 ; 4422.62,3619.23 ccw(c4443.43,3640.03) R4.1@4443.43,3610.61
pads on no net: J1.4 J1.8 J1.9 J1.10 J1.11 J1.12 J1.13 J1.14 J1.15 J1.16 J1.17 J1.18 J1.19 J1.20 J1.21 J1.22 J1.23 J1.24 J1.25 J1.26 J1.27 J1.29 J1.30 J1.33 J1.34 J1.35 J1.36 J1.37 J1.38 J1.39 J1.40 J1.41 J1.42 J1.43 J1.44 J1.45 J1.46 J1.47 J1.48 J1.49 J1.50 J1.51 J1.52 U1.0 U2.3 U2.4 U2.11 U2.12 U2.13 U2.14 U2.15 U2.16 U2.17 U2.18 U2.19 U2.21 U2.22 U2.28 U2.29 U2.34 U2.37 U2.38 U2.39 U2.40 U2.41 U2.42 U2.43 U2.45 U2.46

## Polygon pours and split planes (outlines as drawn)
GND on Bottom Layer "Bottom Layer-No Net" (solid, pour order 2): 3895.45,3967.37 5330.49,3967.37 5330.49,2522.49 3893.48,2522.49
GND on Top Layer "Bottom Layer-No Net" (solid, pour order 4): 3894.51,3958.83 5329.55,3958.83 5329.55,2513.95 3892.55,2513.95 3892.55,2520.64

## Other copper
Top Layer:
  text "MAGI" at 5057.09,3807.09 h39.37
  text "ST" at 3998.03,3781.5 h39.37
  text "Debugger" at 4976.38,3742.13 h39.37
  text "Link" at 3998.03,3722.44 h39.37

## Text inside footprints (layer, text, board x,y; h text height)
J1: Bottom Overlay "AREF" at 4659.57,3649.84 h31.5; Bottom Overlay "5V" at 4739.57,3649.84 h31.5; Bottom Overlay "3V3" at 4849.57,3649.84 h31.5; Bottom Overlay "GND" at 4954.57,3649.84 h31.5; Bottom Overlay "RST" at 5073.98,3510.08 h39.37; Bottom Overlay "A5" at 5073.98,3409.25 h39.37; Bottom Overlay "A4" at 5073.98,3308.41 h39.37; Bottom Overlay "A3" at 5073.98,3207.58 h39.37; Bottom Overlay "A2" at 5073.98,3106.75 h39.37; Bottom Overlay "A1" at 5073.98,3005.91 h39.37; Bottom Overlay "A0" at 5073.98,2905.08 h39.37; Bottom Overlay "D13" at 4953.98,2772.95 h31.5; Bottom Overlay "D12" at 4854.98,2772.95 h31.5; Bottom Overlay "D11" at 4745.48,2772.95 h31.5; Bottom Overlay "D10" at 4656.97,2772.95 h31.5; Bottom Overlay "D9" at 4546.98,2775.08 h39.37; Bottom Overlay "D8" at 4447.98,2775.08 h39.37; Bottom Overlay "D7" at 4348.98,2775.08 h39.37; Bottom Overlay "D6" at 4223.98,2910.08 h39.37; Bottom Overlay "D5" at 4223.98,3010.08 h39.37; Bottom Overlay "D4" at 4223.98,3110.08 h39.37; Bottom Overlay "D3" at 4223.98,3210.08 h39.37; Bottom Overlay "D2" at 4223.98,3310.08 h39.37; Bottom Overlay "D1" at 4223.98,3410.08 h39.37; Bottom Overlay "D0" at 4223.98,3510.08 h39.37; Bottom Layer "MAGI" at 5220,2640 h31.5